# Altium PCB MAX5719 Breakout.PcbDoc
Units mm, origin at the board's own origin, x right, y up, seen from the top; angles counter-clockwise.
Board outline 55 x 55 mm, 4 copper layers (Top Layer, 2 GND, 3 GND, Bottom Layer), stack 1.592 mm thick; 49 components, 28 nets, 143 pads, 471 vias.
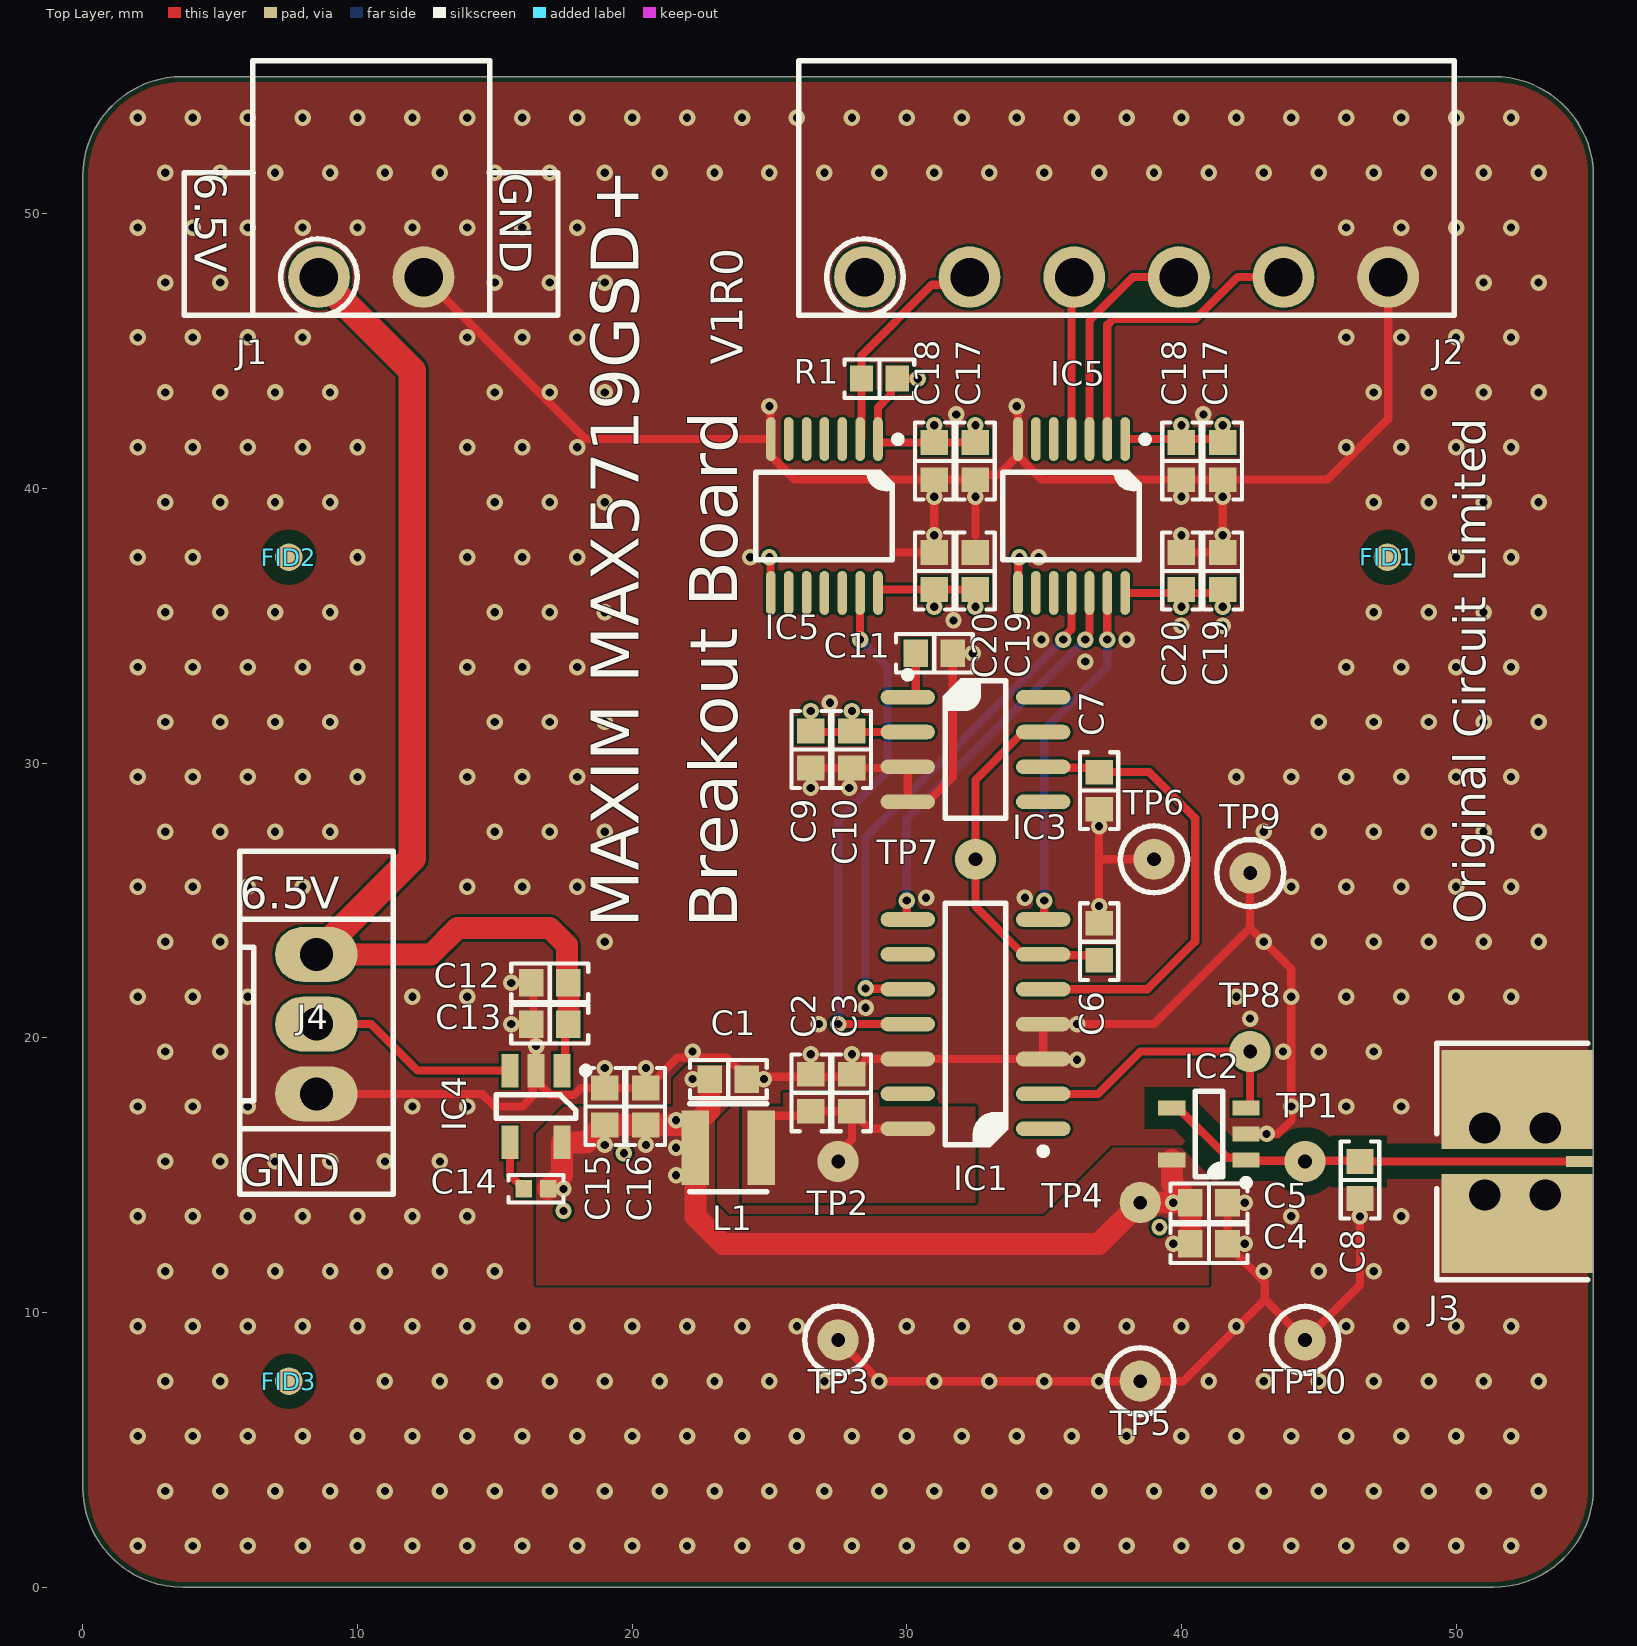
[diagram p0: Top Layer view]
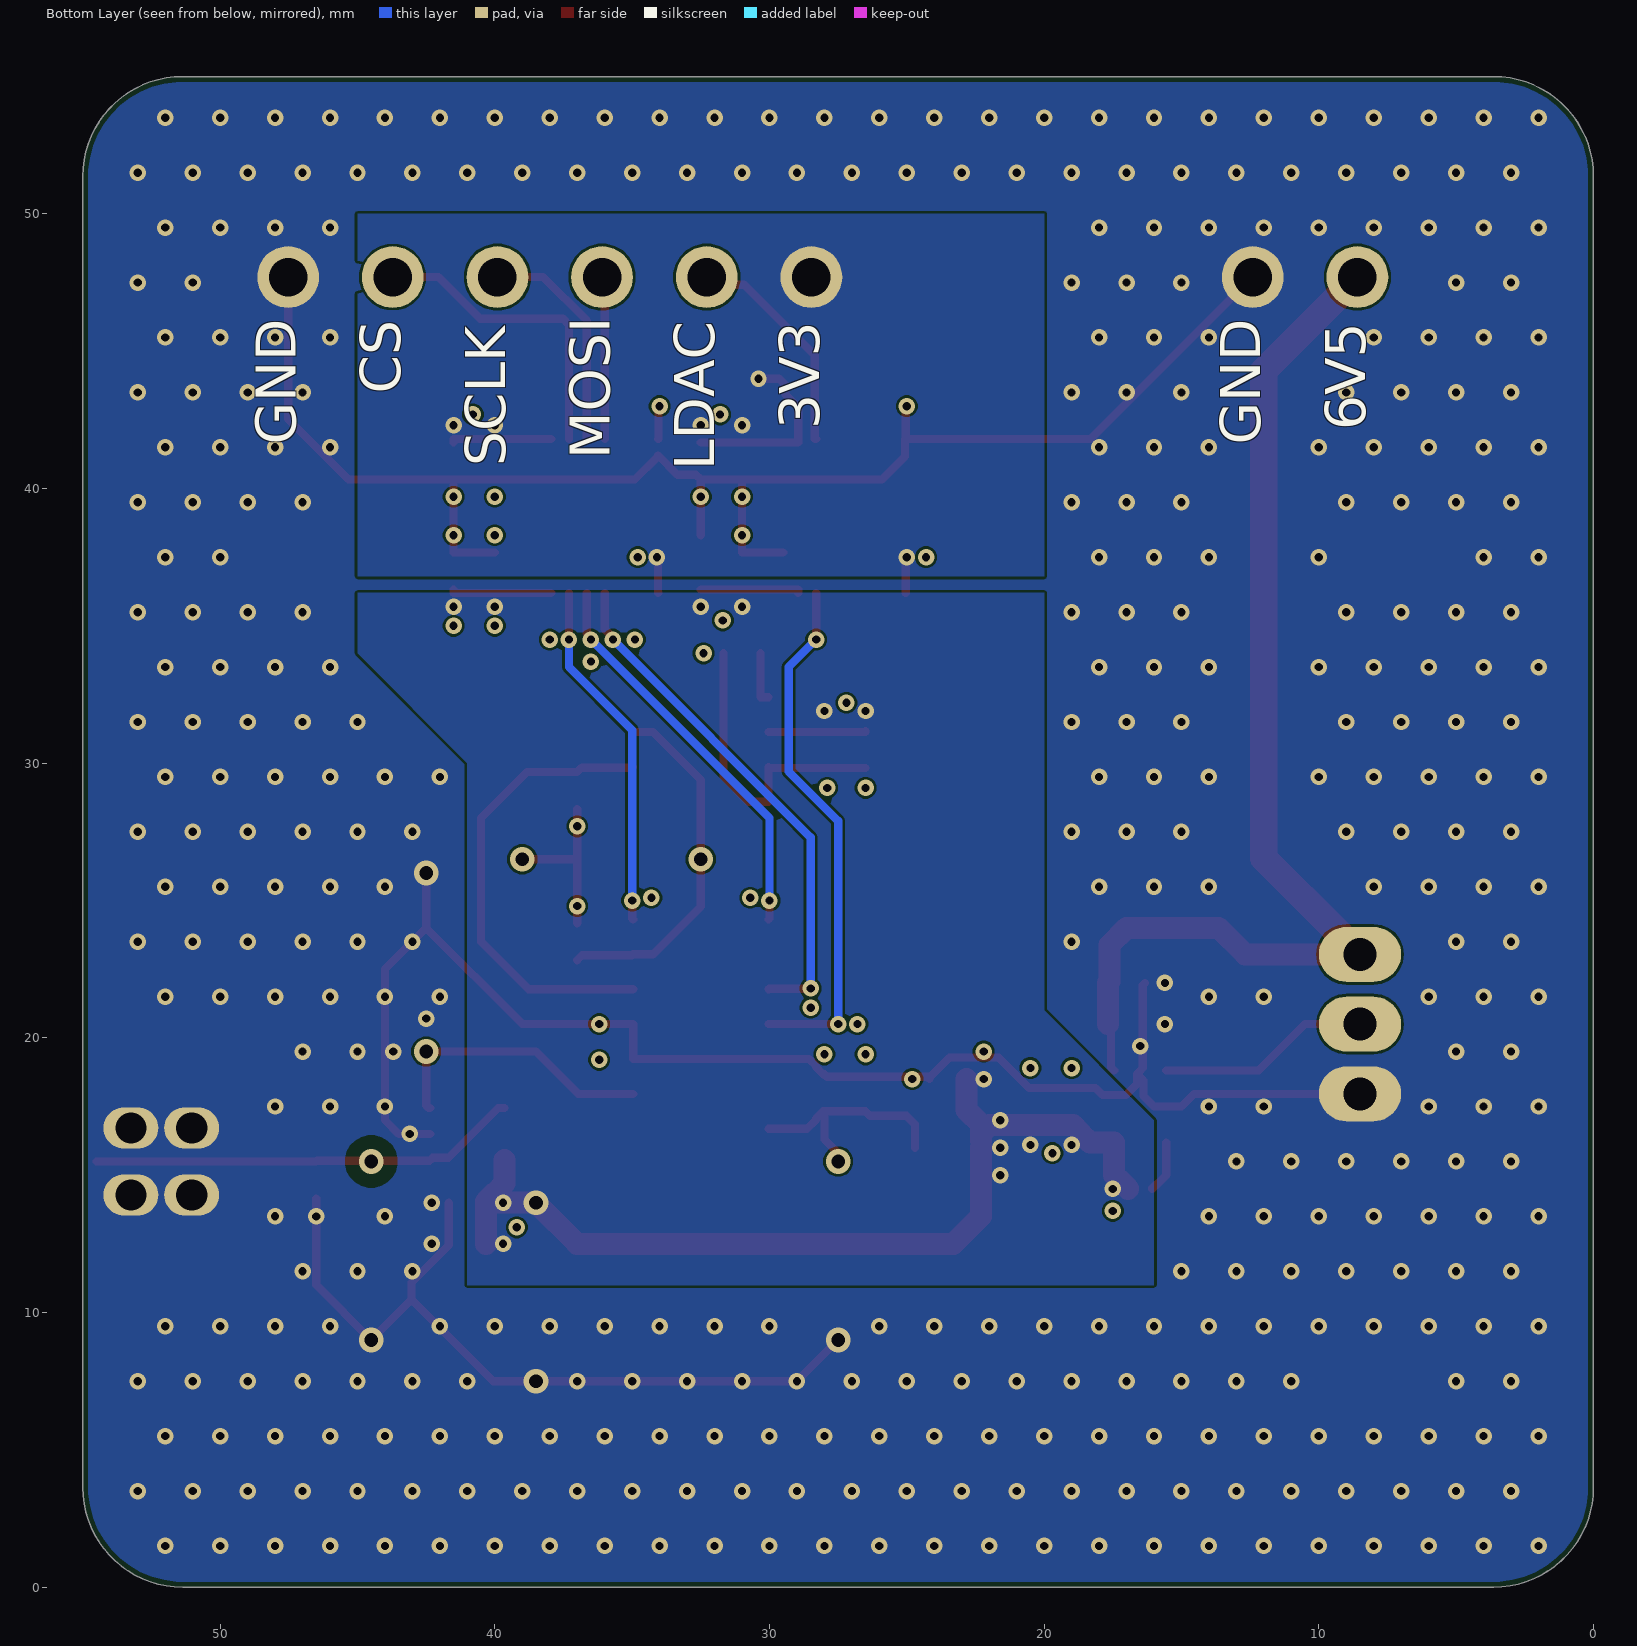
[diagram p1: Bottom Layer view, seen from below]
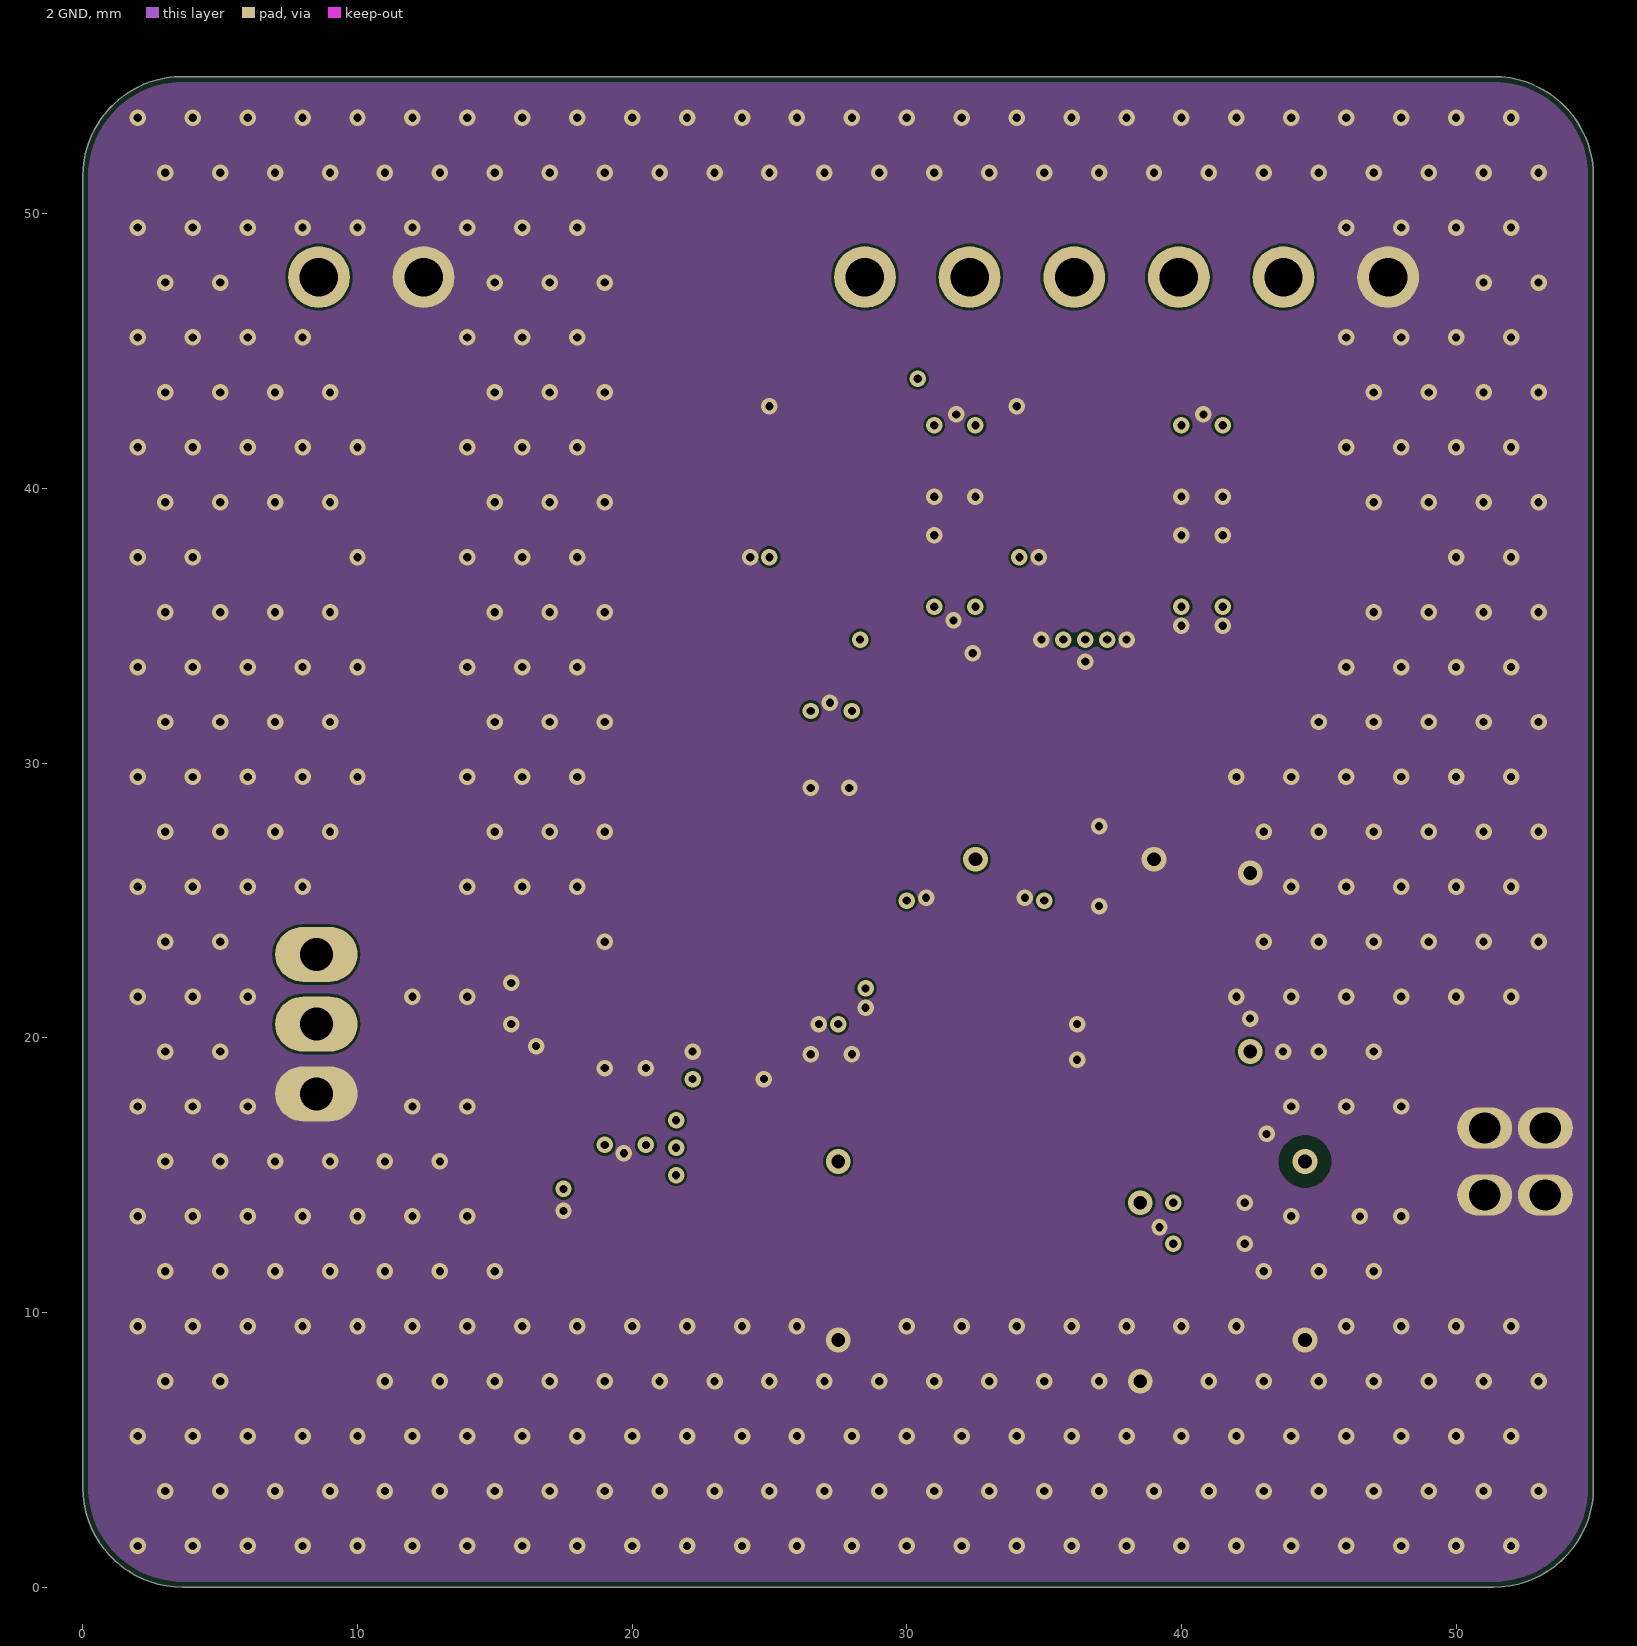
[diagram p2: 2 GND]
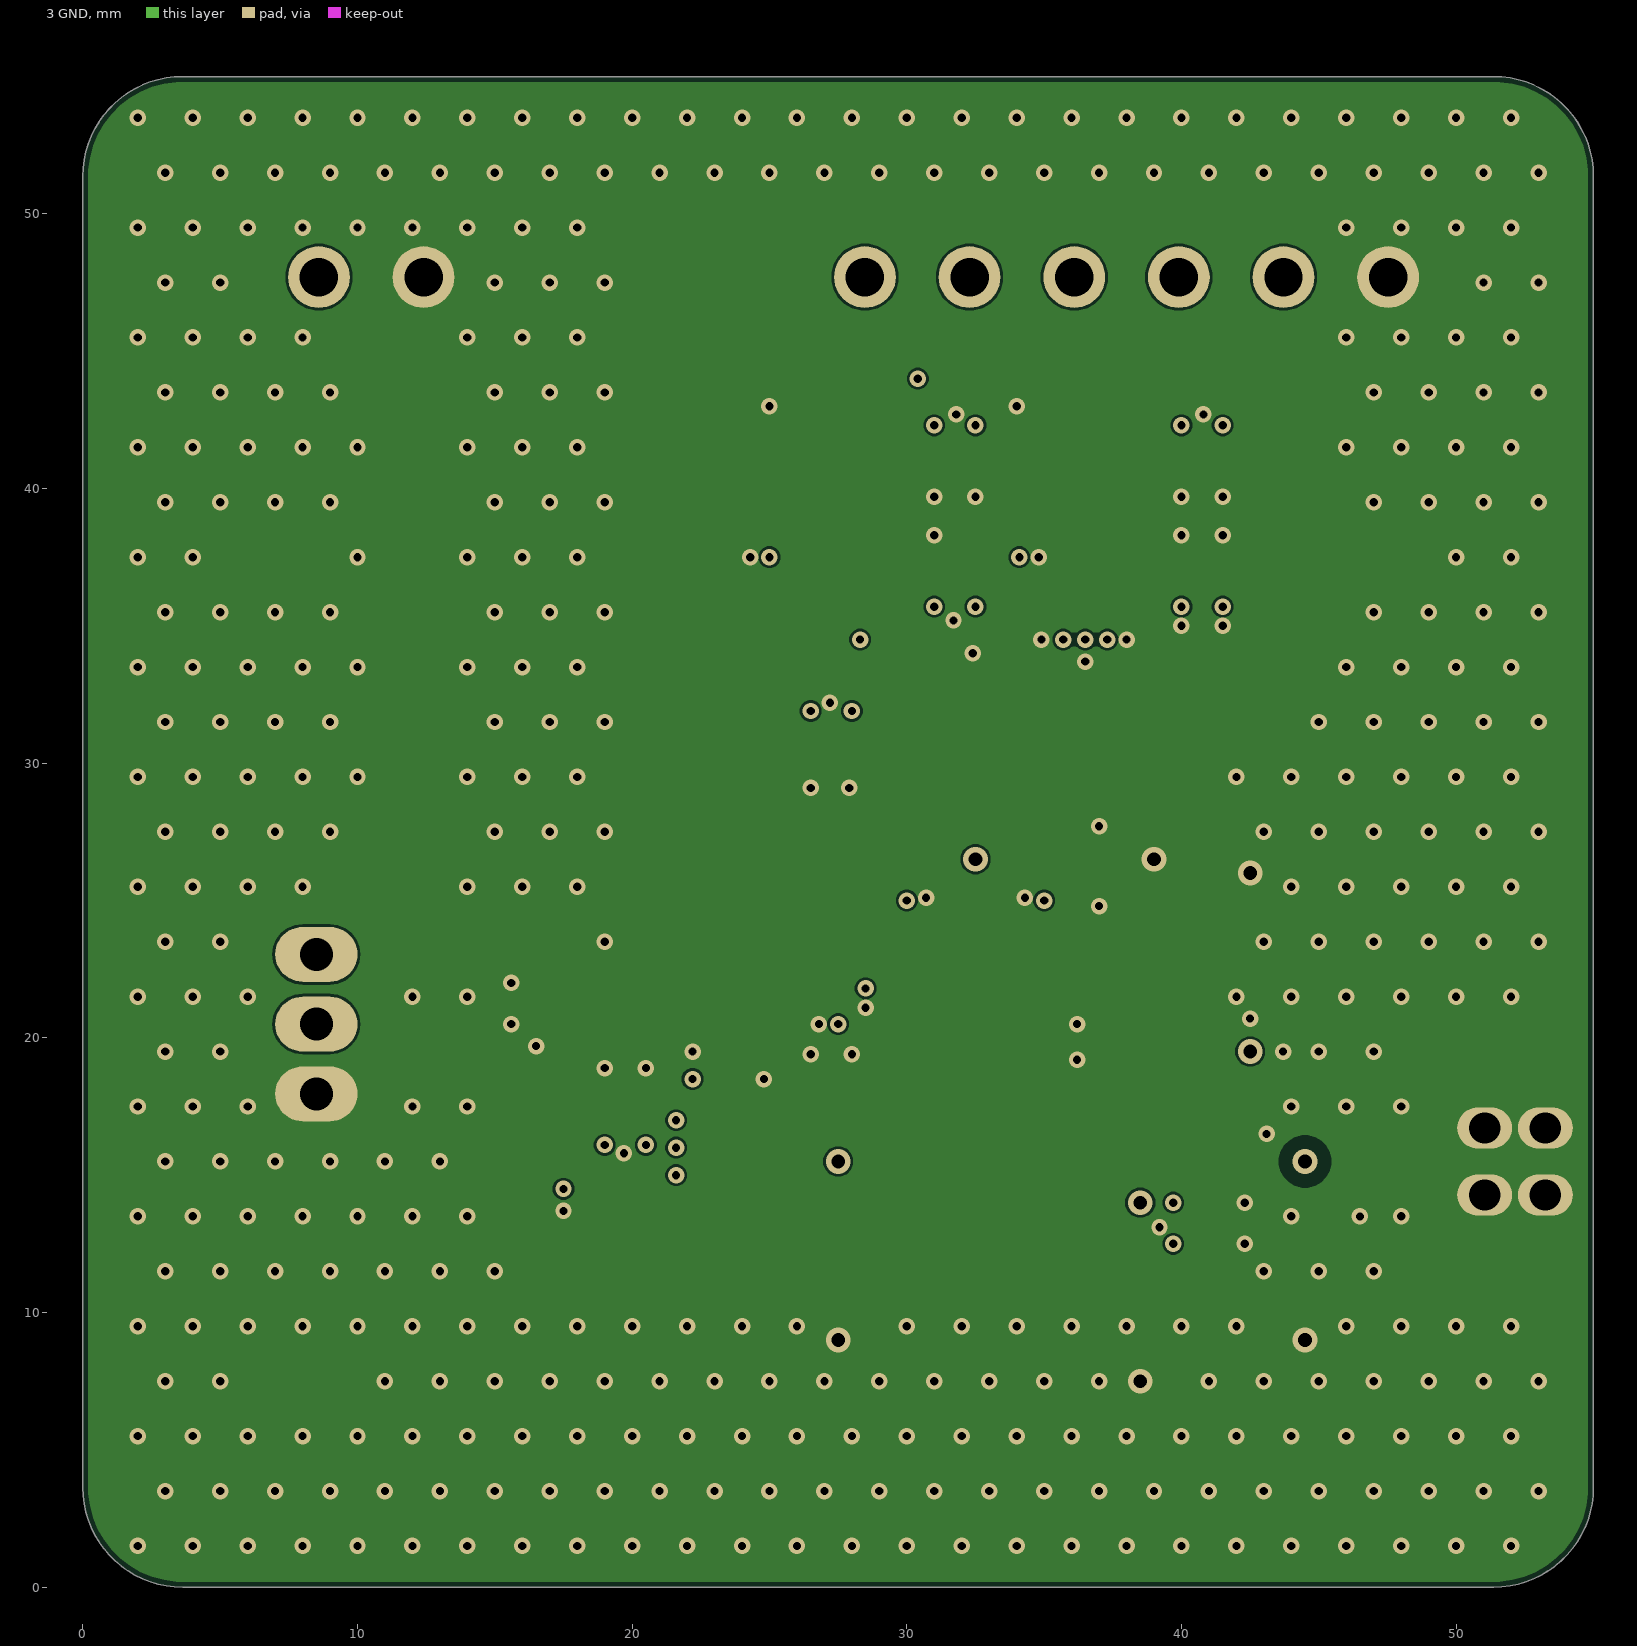
[diagram p3: 3 GND]
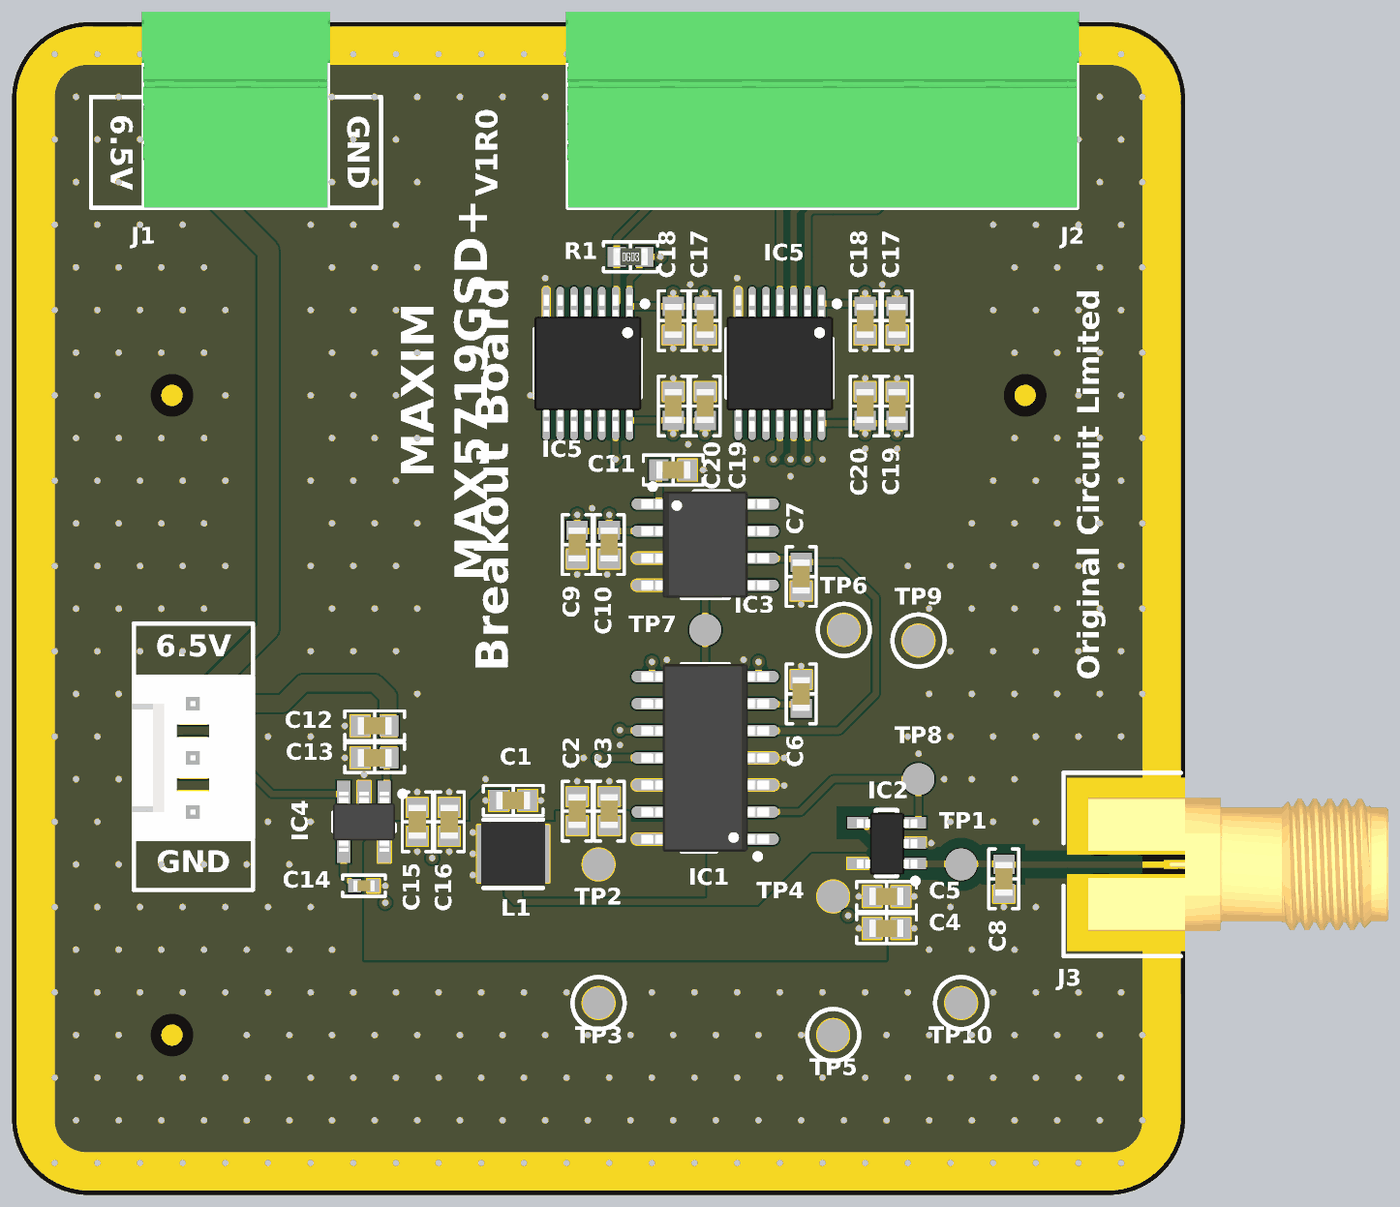
[diagram p4: 3D render of the assembled board from above, using the file's embedded part models]

## Layer stack, top to bottom
Top Solder: solder mask 0.0102, Solder Resist, Dk 3.8
Top Layer: signal copper 0.0356
Dielectric 2: prepreg 0.2104, PP-006, Dk 4.4
2 GND: signal copper 0.0175
Dielectric 1: dielectric 1.065, FR-4, Dk 4.6
3 GND: signal copper 0.0175
Dielectric 3: prepreg 0.2104, PP-006, Dk 4.4
Bottom Layer: signal copper 0.0356
Bottom Solder: solder mask 0.0102, Solder Resist, Dk 3.8

## Board outline
0,3.632 0,51.368 cw(c3.632,51.368) 3.632,55 51.368,55 cw(c51.368,51.368) 55,51.368 55,3.632 cw(c51.368,3.632) 51.368,0 3.632,0 cw(c3.632,3.632)

## Design rules (kind name [scope] priority, off if disabled: settings)
BoardOutlineClearance [IsPoly] p1: gap=0.2 ignorepadtopadclearanceinfootprint=FALSE
Clearance Clearance_BUFFOUT [InNet('BUFF_OUT') vs InPoly] p1: gap=0.5 ignorepadtopadclearanceinfootprint=FALSE
Clearance [All] p2: gap=0.09 ignorepadtopadclearanceinfootprint=FALSE except(0.2: Arc-THPad Track-THPad SMDPad-THPad; 0.5: THPad-THPad)
ComponentClearance [All] p1: gap=0.254 collisioncheckmode=3 verticalgap=0.254 showdistances=TRUE
MinimumSolderMaskSliver [All] p1: minsoldermaskwidth=0.1
PlaneClearance [All] p1: clearance=0.2
PolygonConnect [All] p1: connectstyle=Direct reliefconductorwidth=0.254 reliefentries=4 polygonreliefangle="90 Angle" airgapwidth=0.254
RoutingVias [All] p1: holewidth=0.3 width=0.6 viastyle="Through Hole" minholewidth=0.15 minwidth=0.45 maxholewidth=6.3 maxwidth=6.6
SilkToSilkClearance [All] p1: silktosilkclearance=-3
SilkToSolderMaskClearance [IsPad] p1: minsilkscreentomaskgap=-3 clearancetoexposedcopper=TRUE
SolderMaskExpansion SolderMaskExpansion_Via [IsVia] p1: expansion=0.102 istentingtop=TRUE
SolderMaskExpansion [All] p2: expansion=0.05 istentingtop=FALSE
Width [All] p1: maxlimit=3 minlimit=0.09 preferedwidth=0.2
25 further rules are at their usual default settings.

## Classes and differential pairs
channel class "Level Shifter": LDAC_SHIFT SPI_SHIFT
component class SPI_SHIFT: C17 C18 C19 C20 IC5
component class PSU: C12 C13 C14 C15 C16 IC4 J4
component class Overview: FID1 FID2 FID3 J1 J2 J3 R1 TP1 TP10
component class LDAC_SHIFT: C17 C18 C19 C20 IC5
component class DAC: C1 C2 C3 C4 C5 C6 C7 C8 C9 C10 C11 IC1 IC2 IC3 L1 TP2 TP3 TP4 TP5 TP6 TP7 TP8 TP9

## Components (designator, comment, footprint, x,y, rotation, side; value= is the part's Value field where it differs from the comment)
C1 "22 µF" "CAP 0603_1608" 23.5,18.5 r180 top
C2 "1 µF" "CAP 0603_1608" 26.5,18 r270 top
C3 "0.1 µF" "CAP 0603_1608" 28,18 r90 top
C4 "1 µF" "CAP 0603_1608" 41,12.5 r180 top
C5 "0.1 µF" "CAP 0603_1608" 41,14 r0 top
C6 "1 µF" "CAP 0603_1608" 37,23.5 r270 top
C7 "0.1 µF" "CAP 0603_1608" 37,29 r270 top
C8 "0.1 µF" "CAP 0603_1608" 46.5,14.825 r270 top
C9 "22 µF" "CAP 0603_1608" 26.5,30.5 r90 top
C10 "1 µF" "CAP 0603_1608" 28,30.5 r90 top
C11 "0.1 µF" "CAP 0603_1608" 31,34 r0 top
C12 "22 µF" "CAP 0603_1608" 17,22 r0 top
C13 "1 µF" "CAP 0603_1608" 17,20.5 r0 top
C14 "10000 pF" "CAP 0402_1005" 16.5,14.5 r180 top
C15 "1 µF" "CAP 0603_1608" 19,17.5 r270 top
C16 "22 µF" "CAP 0603_1608" 20.5,17.5 r270 top
C17 "1 µF" "CAP 0603_1608" 41.5,41 r90 top
C17 "1 µF" "CAP 0603_1608" 32.5,41 r90 top
C18 "0.1 µF" "CAP 0603_1608" 40,41 r270 top
C18 "0.1 µF" "CAP 0603_1608" 31,41 r270 top
C19 "1 µF" "CAP 0603_1608" 41.5,37 r270 top
C19 "1 µF" "CAP 0603_1608" 32.5,37 r270 top
C20 "0.1 µF" "CAP 0603_1608" 40,37 r90 top
C20 "0.1 µF" "CAP 0603_1608" 31,37 r90 top
FID1 "Fiducial" Fiducial-1mm 47.5,37.5 r90 top
FID2 "Fiducial" Fiducial-1mm 7.5,37.5 r90 top
FID3 "Fiducial" Fiducial-1mm 7.5,7.5 r90 top
IC1 "MAX5719GSD+" "AD SOIC-14 S14+4" 32.5,20.5 r180 top
IC2 "LMP2011MFX/NOPB" "TI SOT-23-5 DBV" 41,16.5 r180 top
IC3 "MAX6126AASA30+" "AD SOIC-8 S8+4" 32.5,30.5 r0 top
IC4 "LT1761IS5-5#TRMPBF" "AD SOT-23-5 S5  05-08-1635" 16.5,17.5 r270 top
IC5 "TXU0304PWR" "TI TSSOP-14 PW" 36,39 r270 top
IC5 "TXU0304PWR" "TI TSSOP-14 PW" 27,39 r270 top
J1 "OQ0232510000G" "FCI 06-381-2PIN" 10.5,51 r0 top
J2 "OQ0632510000G" "FCI 06-381-6PIN" 38,51 r0 top
J3 "901-10510-2" "AMPHENOL 901-10510-2" 55,15.5 r0 top
J4 "0022272031" "MOLEX KK 0022272031" 8.5,20.5 r270 top
L1 "4.7 µH" "WURTH WE-LQS 3015" 23.5,16 r0 top
R1 "10 kOhms" "RES 0603_1608" 29,44 r0 top
TP1 "Test Point" TestPoint-1.5mm#1 44.5,15.5 r0 top
TP2 "Test Point" TestPoint-1.5mm#1 27.5,15.5 r90 top
TP3 "Test Point" TestPoint-1.5mm#1 27.5,9 r90 top
TP4 "Test Point" TestPoint-1.5mm#1 38.5,14 r90 top
TP5 "Test Point" TestPoint-1.5mm#2 38.5,11.5 r90 top
TP6 "Test Point" TestPoint-1.5mm#1 39,26.5 r90 top
TP7 "Test Point" TestPoint-1.5mm#1 32.5,26.5 r90 top
TP8 "Test Point" TestPoint-1.5mm#1 42.5,19.5 r90 top
TP9 "Test Point" TestPoint-1.5mm#1 42.5,26 r90 top
TP10 "Test Point" TestPoint-1.5mm#1 44.5,9 r90 top

## Footprints (in the part's own frame and the unit in brackets; to place one, negate y for a bottom-side part, rotate by r counter-clockwise, add the part's x,y. Pads: shape width x height; smd on the part's side, far side on the other; paste and mask are expansions set on the pad)
"AD SOIC-8 S8+4" [mm] "SOIC, 8-Leads, Body 4.90x3.90mm, Pitch 1.27mm, IPC Medium Density"
  oval 1.98x0.53 smd: 1(-2.465,1.905) 2(-2.465,0.635) 3(-2.465,-0.635) 4(-2.465,-1.905) 5(2.465,-1.905) 6(2.465,-0.635) 7(2.465,0.635) 8(2.465,1.905)
  silkscreen extent -2.59,-2.5 1.1,2.84, body extent -3,-2.5 3,2.5, height 1.75
"AD SOIC-14 S14+4" [mm] "SOIC, 14-Leads, Body 8.65x3.90mm, Pitch 1.27mm, IPC Medium Density"
  oval 1.981x0.533 smd: 1(-2.464,3.81) 2(-2.464,2.54) 3(-2.464,1.27) 4(-2.464,0) 5(-2.464,-1.27) 6(-2.464,-2.54) 7(-2.464,-3.81) 8(2.464,-3.81) 9(2.464,-2.54) 10(2.464,-1.27) 11(2.464,0) 12(2.464,1.27) 13(2.464,2.54) 14(2.464,3.81)
  silkscreen extent -2.59,-4.4 1.1,4.75, body extent -3,-4.4 3,4.4, height 1.75
"AD SOT-23-5 S5  05-08-1635" [mm] "SOT23, 5-Leads, Body 2.90x2.80mm, Pitch 0.95mm, IPC Medium Density"
  rect 1.22x0.62 smd: 1(-1.31,0.95) 2(-1.31,0) 3(-1.31,-0.95) 4(1.31,-0.95) 5(1.31,0.95)
  silkscreen extent -1.43,-1.45 0.43,1.94, body extent -1.4,-1.45 1.4,1.45, height 1
"AMPHENOL 901-10510-2" [mm] "High Freq End Launch SMA Jack PC Mount"
  oval 2x1.5 hole 1.14: G(-3.96,-1.22) G(-3.96,1.22) G(-1.75,-1.22) G(-1.75,1.22)
  rect 5.54x3.61 smd paste-2539.97 mask+0: G(-2.77,-2.26) G(-2.77,2.26)
  rect 1x0.41 smd paste-2539.97 mask+0: S(-0.5,0)
  silkscreen extent -5.7,-4.3 -0.2,4.3, body extent -4.55,-3.14 9.53,3.14, height 3.22
"CAP 0402_1005" [mm] "Chip Capacitor, 2-Leads, Body 1.02x0.51mm, IPC Medium Density"
  rect 0.6x0.64 smd: 1(-0.44,0) 2(0.44,0)
  silkscreen extent -1,-0.5 1,0.5, body extent -0.5,-0.26 0.5,0.26, height 0.52
"CAP 0603_1608" [mm] "Chip Capacitor, 2-Leads, Body 1.60x0.80mm, IPC Medium Density"
  rect 0.9x1 smd: 1(-0.675,0) 2(0.675,0)
  silkscreen extent -1.4,-0.7 1.4,0.7, body extent -0.8,-0.41 0.8,0.41, height 0.82
"FCI 06-381-2PIN" [mm] "FCI Pluggable Terminal Block"
  round 2.25 hole 1.4: 1(-1.905,-3.302) 2(1.905,-3.302)
  silkscreen extent -4.32,-4.7 4.32,4.57, body extent -4.4,-4.7 4.4,4.5, height 7.6
"FCI 06-381-6PIN" [mm] "FCI Pluggable Terminal Block"
  round 2.25 hole 1.4: 1(-9.525,-3.302) 2(-5.715,-3.302) 3(-1.905,-3.302) 4(1.905,-3.302) 5(5.715,-3.302) 6(9.525,-3.302)
  silkscreen extent -11.94,-4.7 11.94,4.57, body extent -12.02,-4.7 12.02,4.5, height 7.6
Fiducial-1mm [mm]
  round 1 smd paste-1 mask+0.5: F(0,0)
  Top Layer pour cut-out: -1,0 -0.924,0.383 -0.707,0.707 -0.383,0.924 0,1 0,1 0.383,0.924 0.707,0.707 0.924,0.383 1,0 1,0 0.924,-0.383 0.707,-0.707 0.383,-0.924 0,-1 0,-1 -0.383,-0.924 -0.707,-0.707 -0.924,-0.383 -1,0
"MOLEX KK 0022272031" [mm]
  oval 2x3 hole 1.2: 1(-2.54,0) 2(0,0) 3(2.54,0)
  silkscreen extent -3.81,-2.79 3.81,2.79, body extent -3.81,-2.9 3.81,2.9, height 11.7
"RES 0603_1608" [mm] "Chip Resistor, 2-Leads, Body 1.60x0.80mm, IPC Medium Density"
  rect 0.85x0.95 smd: 1(-0.65,0) 2(0.65,0)
  silkscreen extent -1.27,-0.7 1.27,0.7, body extent -0.8,-0.4 0.8,0.4, height 0.45
TestPoint-1.5mm#1 [mm]
  round 1.5 smd: 1(0,0)
TestPoint-1.5mm#2 [mm]
  round 1.5 smd: 1(-4,0)
"TI SOT-23-5 DBV" [mm] "SOT23, 5-Leads, Body 2.90x2.80mm, Pitch 0.95mm, IPC Medium Density"
  rect 1x0.55 smd: 1(-1.35,0.95) 2(-1.35,0) 3(-1.35,-0.95) 4(1.35,-0.95) 5(1.35,0.95)
  silkscreen extent -1.48,-1.55 0.5,1.9, body extent -1.44,-1.43 1.39,1.48, height 1.5
"TI TSSOP-14 PW" [mm] "TSSOP, 14-Leads, Body 5.00x4.40mm, Pitch 0.65mm, IPC Medium Density"
  oval 1.6x0.35 smd: 1(-2.8,1.95) 2(-2.8,1.3) 3(-2.8,0.65) 4(-2.8,0) 5(-2.8,-0.65) 6(-2.8,-1.3) 7(-2.8,-1.95) 8(2.8,-1.95) 9(2.8,-1.3) 10(2.8,-0.65) 11(2.8,0) 12(2.8,0.65) 13(2.8,1.3) 14(2.8,1.95)
  silkscreen extent -2.92,-2.5 1.6,2.8, body extent -3.21,-2.5 3.21,2.5, height 1.2
"WURTH WE-LQS 3015" [mm] "SMD Power Inductor, 2-Leads, body 3x3mm"
  rect 1x2.7 smd: 1(-1.2,0) 2(1.2,0)
  silkscreen extent -1.4,-1.6 1.4,1.6, body extent -1.5,-1.5 1.5,1.5, height 1.5

## Part data
C1 C9 C12 C16: library part CL10A226MP8NUNE, "CAP CER 22UF 10V X5R 0603", Device Package="0603 (1608 Metric)", Manufacturer="Samsung Electro-Mechanics", Operating Temperature="-55°C ~ 85°C", Supplier Part Number 1=1276-1274-1-ND, Temperature Coefficient=X5R, Tolerance=±20%, Voltage - Rated=10V, Applications="General Purpose", Capacitance="22 µF", ComponentLink1Description=Datasheet, ComponentLink1URL=http://www.samsungsem.com/kr/support/product-search/mlcc/CL10A226MP8NUNE.jsp, ComponentLink2Description="DigiKey Link", ComponentLink2URL=https://www.digikey.com/en/products/detail/samsung-electro-mechanics/CL10A226MP8NUNE/3886932, LastUpdated="02/11/2023 19:13:02", Lifecycle Status=Active, Minimum Order=1, Mounting Type="Surface Mount, MLCC", Package / Case="0603 (1608 Metric)", Packaging=TapeAndReel, Part Number=CL10A226MP8NUNE, Part Status=Active, partid=11458, Price=0.02, Series=CL, Size / Dimension="0.063\" L x 0.031\" W (1.60mm x 0.80mm)", Supplier 1=DigiKey, Thickness (Max)="0.035\" (0.90mm)"
C2 C4 C6 C10 C13 C15 C17 C17 C19 C19: library part GCM188R71E105KA64D, "CAP CER 1UF 25V X7R 0603", Device Package="0603 (1608 Metric)", Manufacturer="Murata Electronics", Operating Temperature="-55°C ~ 125°C", Ratings=AEC-Q200, Supplier Part Number 1=490-10673-1-ND, Temperature Coefficient=X7R, Tolerance=±10%, Voltage - Rated=25V, Applications=Automotive, Capacitance="1 µF", ComponentLink1Description=Datasheet, ComponentLink1URL=https://www.murata.com/~/media/webrenewal/support/library/catalog/products/capacitor/mlcc/c03e.ashx?la=en-us, ComponentLink2Description="DigiKey Link", ComponentLink2URL=https://www.digikey.com/en/products/detail/murata-electronics/GCM188R71E105KA64D/4903956, LastUpdated="20/08/2023 19:09:04", Lifecycle Status=Active, Minimum Order=1, Mounting Type="Surface Mount, MLCC", Package / Case="0603 (1608 Metric)", Packaging=TapeAndReel, Part Number=GCM188R71E105KA64D, Part Status=Active, partid=6762, Price=0.03, Series=GCM, Size / Dimension="0.063\" L x 0.031\" W (1.60mm x 0.80mm)", Supplier 1=DigiKey, Thickness (Max)="0.035\" (0.90mm)"
C3 C5 C7 C8 C11 C18 C18 C20 C20: library part CL10B104KB8NNNC, "CAP CER 0.1UF 50V X7R 0603", Device Package="0603 (1608 Metric)", Manufacturer="Samsung Electro-Mechanics", Operating Temperature="-55°C ~ 125°C", Supplier Part Number 1=1276-1000-1-ND, Temperature Coefficient=X7R, Tolerance=±10%, Voltage - Rated=50V, Applications="General Purpose", Capacitance="0.1 µF", ComponentLink1Description=Datasheet, ComponentLink1URL=http://www.samsungsem.com/kr/support/product-search/mlcc/CL10B104KB8NNNC.jsp, ComponentLink2Description="DigiKey Link", ComponentLink2URL=https://www.digikey.com/en/products/detail/samsung-electro-mechanics/CL10B104KB8NNNC/3886658, LastUpdated="02/11/2023 19:13:06", Lifecycle Status=Active, Minimum Order=1, Mounting Type="Surface Mount, MLCC", Package / Case="0603 (1608 Metric)", Packaging=TapeAndReel, Part Number=CL10B104KB8NNNC, Part Status=Active, partid=9788, Price=0.01, Series=CL, Size / Dimension="0.063\" L x 0.031\" W (1.60mm x 0.80mm)", Supplier 1=DigiKey, Thickness (Max)="0.035\" (0.90mm)"
C14: library part GCM155R71H103KA55D, "CAP CER 10000PF 50V X7R 0402", Device Package="0402 (1005 Metric)", Manufacturer="Murata Electronics", Operating Temperature="-55°C ~ 125°C", Ratings=AEC-Q200, Supplier Part Number 1=490-4762-1-ND, Temperature Coefficient=X7R, Tolerance=±10%, Voltage - Rated=50V, Applications=Automotive, Capacitance="10000 pF", ComponentLink1Description=Datasheet, ComponentLink1URL=https://psearch.en.murata.com/capacitor/product/GCM155R71H103KA55%23.pdf, ComponentLink2Description="DigiKey Link", ComponentLink2URL=https://www.digikey.com/en/products/detail/murata-electronics/GCM155R71H103KA55D/1641636, LastUpdated="20/01/2024 20:04:13", Lifecycle Status=Active, Minimum Order=1, Mounting Type="Surface Mount, MLCC", Package / Case="0402 (1005 Metric)", Packaging=CutTape, Part Number=GCM155R71H103KA55D, Part Status=Active, partid=12687, Price=0.01, Series=GCM, Size / Dimension="0.039\" L x 0.020\" W (1.00mm x 0.50mm)", Supplier 1=DigiKey, Thickness (Max)="0.022\" (0.55mm)"
FID1 FID2 FID3: library part CMP-002-000000-1, Component Type=Standard, Design Item ID=Fiducial, Pin Count=0, Source=Fiducial.SchLib
IC1: "IC DAC 20BIT V-OUT 14SOIC", Manufacturer="Analog Devices Inc./Maxim Integrated", Operating Temperature="-40°C ~ 105°C", Supplier Device Package=14-SOIC, Supplier Part Number 1=MAX5719GSD+-ND, Voltage - Supply, Analog=5V, Architecture=R-2R, ComponentLink1Description=Datasheet, ComponentLink1URL=https://datasheets.maximintegrated.com/en/ds/MAX5717-MAX5719.pdf, ComponentLink2Description="DigiKey Link", ComponentLink2URL=https://www.digikey.com/en/products/detail/analog-devices-inc-maxim-integrated/MAX5719GSD/6166219, Data Interface="SPI, DSP", Differential Output=No, INL/DNL (LSB)="±1, ±1", LastUpdated="16/03/2024 19:39:58", Lifecycle Status=Active, Minimum Order=1, Mounting Type="Surface Mount", Number of Bits=20, Number of D/A Converters=1, Output Type="Voltage - Unbuffered", Packaging=Tube, Part Number=MAX5719GSD+, Part Status=Active, partid=4, Price=24.08, Reference Type=External, Series=-, Settling Time="1.5µs (Typ)", Supplier 1=DigiKey, Voltage - Supply, Digital=5V
IC2: "IC OPAMP GP 1 CIRCUIT SOT23-5", Current - Input Bias="3 pA", Current - Output / Channel="17 mA", Current - Supply=930µA, Manufacturer="Texas Instruments", Operating Temperature="-40°C ~ 125°C", Package / Case="SC-74A, SOT-753", Supplier Device Package=SOT-23-5, Supplier Part Number 1=LMP2011MFX/NOPBCT-ND, Voltage - Input Offset="0.12 µV", Voltage - Supply, Single/Dual (±)="2.7V ~ 5.25V", Amplifier Type="General Purpose", ComponentLink1Description=Datasheet, ComponentLink1URL=http://www.ti.com/general/docs/suppproductinfo.tsp?distId=10&gotoUrl=http%3A%2F%2Fwww.ti.com%2Flit%2Fgpn%2Flmp2011, ComponentLink2Description="DigiKey Link", ComponentLink2URL=https://www.digikey.com/en/products/detail/texas-instruments/LMP2011MFX-NOPB/1872224, Gain Bandwidth Product="3 MHz", LastUpdated="22/03/2024 21:05:57", Lifecycle Status=Active, Minimum Order=1, Mounting Type="Surface Mount", Number of Circuits=1, Output Type=Rail-to-Rail, Packaging=TapeAndReel, Part Number=LMP2011MFX/NOPB, Part Status=Active, partid=61, Price=1.14, Series=LMP®, Slew Rate=4V/µs, Supplier 1=DigiKey
IC3: "IC VREF SERIES 0.02% 8SOIC", Current - Output=10mA, Current - Supply=725µA, Manufacturer="Maxim Integrated", Operating Temperature="-40°C ~ 125°C (TA)", Package / Case="8-SOIC (0.154\", 3.90mm Width)", Supplier Device Package=8-SOIC, Supplier Part Number 1=MAX6126AASA30+-ND, Temperature Coefficient=5ppm/°C, Tolerance=±0.02%, Voltage - Input="3.2V ~ 12.6V", Voltage - Output (Min/Fixed)=3V, ComponentLink1Description=Datasheet, ComponentLink1URL=https://datasheets.maximintegrated.com/en/ds/MAX6126.pdf, ComponentLink2Description="DigiKey Link", ComponentLink2URL=http://digikey.com/product-detail/en/maxim-integrated/MAX6126AASA30/MAX6126AASA30-ND/1867184, LastUpdated="16/03/2024 19:47:53", Lifecycle Status=Active, Minimum Order=1, Mounting Type="Surface Mount", Noise - 0.1Hz to 10Hz=1.75µVp-p, Output Type=Fixed, Packaging=Tube, Part Number=MAX6126AASA30+, Part Status=Active, Price=7.82, Reference Type=Series, Series=-, Supplier 1=DigiKey
IC4: "IC REG LINEAR 5V 100MA TSOT23-5", Current - Output=100mA, Manufacturer="Analog Devices Inc.", Operating Temperature="-40°C ~ 125°C", Supplier Device Package=TSOT-23-5, Supplier Part Number 1=505-LT1761IS5-5#TRMPBFCT-ND, Voltage - Input (Max)=20V, Voltage - Output (Min/Fixed)=5V, Voltage Dropout (Max)="0.45V @ 100mA", ComponentLink1Description=Datasheet, ComponentLink1URL=https://www.analog.com/media/en/technical-documentation/data-sheets/1761sff.pdf, ComponentLink2Description="DigiKey Link", ComponentLink2URL=https://www.digikey.com/en/products/detail/analog-devices-inc/LT1761IS5-5-TRMPBF/2107694, Control Features=Enable, LastUpdated="16/03/2024 20:02:34", Lifecycle Status=Active, Minimum Order=1, Mounting Type="Surface Mount", Number of Regulators=1, Output Configuration=Positive, Output Type=Fixed, Packaging=TapeAndReel, Part Number=LT1761IS5-5#TRMPBF, Part Status=Active, Price=1.91, Protection Features="Over Current, Over Temperature, Reverse Polarity", PSRR="65dB (120Hz)", Series=-, Supplier 1=DigiKey
IC5 IC5: "IC TRANSLATOR UNIDIR 14TSSOP", Manufacturer="Texas Instruments", Operating Temperature="-40°C ~ 125°C (TA)", Supplier Device Package=14-TSSOP, Supplier Part Number 1=296-TXU0304PWRCT-ND, Voltage - VCCA="1.08 V ~ 5.5 V", Channel Type=Unidirectional, Channels per Circuit=4, ComponentLink1Description=Datasheet, ComponentLink1URL=https://www.ti.com/general/docs/suppproductinfo.tsp?distId=10&gotoUrl=http%3A%2F%2Fwww.ti.com%2Flit%2Fgpn%2Ftxu0304, ComponentLink2Description="DigiKey Link", ComponentLink2URL=https://www.digikey.com/en/products/detail/texas-instruments/TXU0304PWR/14641423, Data Rate=200Mbps, LastUpdated="16/03/2024 20:45:15", Lifecycle Status=Active, Minimum Order=1, Mounting Type="Surface Mount", Number of Circuits=1, Output Type=Tri-State, Packaging=TapeAndReel, Part Number=TXU0304PWR, Part Status=Active, Price=0.32, Series=-, Supplier 1=DigiKey, Translator Type="Voltage Level", Voltage - VCCB="1.08 V ~ 5.5 V"
J1: "TERM BLOCK HDR 2POS 90DEG 3.81MM", Color=Green, Current - UL=10A, Manufacturer="Amphenol Anytek", Operating Temperature="-40°C ~ 115°C", Supplier Part Number 1=609-3819-ND, Voltage - UL=300V, ComponentLink1Description=Datasheet, ComponentLink1URL=http://portal.fciconnect.com/Comergent//fci/drawing/oqxx32x100j0g.pdf, ComponentLink2Description="DigiKey Link", ComponentLink2URL=//digikey.com/product-detail/en/amphenol-anytek/OQ0232510000G/609-3819-ND/2261255, Contact Mating Finish=Tin, Header Orientation="90°, Right Angle", LastUpdated="16/12/2019 19:14:30", Lifecycle Status=0, Minimum Order=1, Mounting Type="Through Hole", Number of Levels=1, Number of Positions=2, Packaging=Bulk, Part Number=OQ0232510000G, Part Status=Active, Pitch="0.150\" (3.81mm)", Positions Per Level=2, Price=0.49, Series=06-381, Supplier 1=DigiKey, Termination Style=Solder, Type="Header, Male Pins, Shrouded (4 Side)"
J2: "TERM BLOCK HDR 6POS 90DEG 3.81MM", Color=Green, Current - UL=10A, Manufacturer="Amphenol Anytek", Operating Temperature="-40°C ~ 115°C", Supplier Part Number 1=609-3823-ND, Voltage - UL=300V, ComponentLink1Description=Datasheet, ComponentLink1URL=http://portal.fciconnect.com/Comergent//fci/drawing/oqxx32x100j0g.pdf, ComponentLink2Description="DigiKey Link", ComponentLink2URL=//digikey.com/product-detail/en/amphenol-anytek/OQ0632510000G/609-3823-ND/2261282, Contact Mating Finish=Tin, Header Orientation="90°, Right Angle", LastUpdated="16/12/2019 19:16:11", Lifecycle Status=0, Minimum Order=1, Mounting Type="Through Hole", Number of Levels=1, Number of Positions=6, Packaging=Bulk, Part Number=OQ0632510000G, Part Status=Active, Pitch="0.150\" (3.81mm)", Positions Per Level=6, Price=0.80, Series=06-381, Supplier 1=DigiKey, Termination Style=Solder, Type="Header, Male Pins, Shrouded (4 Side)"
J3: "CONN SMA JACK R/A 50OHM EDGE MNT", Frequency - Max="26.5 GHz", Manufacturer="Amphenol RF", Supplier Part Number 1=ARF2496-ND, ComponentLink1Description=Datasheet, ComponentLink1URL=http://www.amphenolrf.com/index.php/downloads/dl/file/id/7684/product/0/sma_high_frequency_connectors.pdf, ComponentLink2Description="DigiKey Link", ComponentLink2URL=https://www.digikey.com/en/products/detail/amphenol-rf/901-10510-2/6051059, Connector Style=SMA, Connector Type="Jack, Female Socket", Contact Termination=Solder, Fastening Type=Threaded, Impedance=50Ohm, LastUpdated="29/03/2023 22:34:51", Lifecycle Status=Active, Minimum Order=1, Mounting Type="Board Edge, End Launch; Through Hole, Right Angle", Number of Ports=1, Packaging=Bulk, Part Number=901-10510-2, Part Status=Active, Price=7.52, Series=-, Shield Termination=Solder, Supplier 1=DigiKey
J4: "CONN HEADER VERT 3POS 2.54MM", Insulation Color=Natural, Manufacturer=Molex, Material Flammability Rating="UL94 V-0", Supplier Part Number 1=WM4112-ND, ComponentLink1Description=Datasheet, ComponentLink1URL=https://www.molex.com/pdm_docs/sd/022272031_sd.pdf, ComponentLink2Description="DigiKey Link", ComponentLink2URL=http://digikey.com/product-detail/en/molex/0022272031/WM4112-ND/1130578, Connector Type=Header, Contact Finish - Mating=Tin, Contact Finish - Post=Tin, Contact Finish Thickness - Mating="100.0µin (2.54µm)", Contact Length - Mating="0.295\" (7.49mm)", Contact Length - Post="0.140\" (3.56mm)", Contact Material=Brass, Contact Shape=Square, Contact Type="Male Pin", Fastening Type="Friction Lock", Insulation Height="0.461\" (11.70mm)", Insulation Material="Polyamide (PA), Nylon", LastUpdated="12/01/2020 23:51:54", Lifecycle Status=Active, Minimum Order=1, Mounting Type="Through Hole", Number of Positions=3, Number of Positions Loaded=All, Number of Rows=1, Overall Contact Length="0.560\" (14.22mm)", Packaging=Bulk, Part Number=0022272031, Part Status=Active, partid=77, Pitch - Mating="0.100\" (2.54mm)", Price=0.37, Series="KK 6410", Shrouding="Shrouded - 1 Wall", Style="Board to Cable/Wire", Supplier 1=DigiKey, Termination=Solder
L1: library part 74404032047, "FIXED IND 4.7UH 1.3A 96 MOHM SMD", Current - Saturation=1.2A, Current Rating (Amps)="1.3 A", DC Resistance (DCR)=96mOhm, Device Package=Nonstandard, Frequency - Self Resonant=50MHz, Inductance Frequency - Test="100 kHz", Manufacturer="Würth Elektronik", Operating Temperature="-40°C ~ 125°C", Ratings=AEC-Q200, Supplier Device Package=3015, Supplier Part Number 1=732-5495-1-ND, Tolerance=±20%, ComponentLink1Description=Datasheet, ComponentLink1URL=https://katalog.we-online.de/pbs/datasheet/74404032047.pdf, ComponentLink2Description="DigiKey Link", ComponentLink2URL=https://www.digikey.com/en/products/detail/würth-elektronik/74404032047/4865640, Height - Seated (Max)="0.059\" (1.50mm)", Inductance="4.7 µH", LastUpdated="16/03/2024 20:32:51", Lifecycle Status=Active, Material - Core=Ferrite, Minimum Order=1, Mounting Type="Surface Mount", Package / Case=Nonstandard, Packaging=TapeAndReel, Part Number=74404032047, Part Status=Active, partid=7005, Price=0.66, Series=WE-LQS, Shielding=Shielded, Size / Dimension="0.118\" L x 0.118\" W (3.00mm x 3.00mm)", Supplier 1=DigiKey, Type="Drum Core, Wirewound"
R1: library part CR0603-FX-1002ELF, "RES SMD 10K OHM 1% 1/10W 0603", Device Package="0603 (1608 Metric)", Manufacturer="Bourns Inc.", Operating Temperature="-55°C ~ 155°C", Power (Watts)="0.1W, 1/10W", Supplier Device Package=0603, Supplier Part Number 1=CR0603-FX-1002ELFCT-ND, Temperature Coefficient=±100ppm/°C, Tolerance=±1%, ComponentLink1Description=Datasheet, ComponentLink1URL=https://www.bourns.com/docs/Product-Datasheets/CHPREZTR.pdf, ComponentLink2Description="DigiKey Link", ComponentLink2URL=https://www.digikey.com/en/products/detail/bourns-inc/CR0603-FX-1002ELF/3593188, Composition="Thick Film", Features="Moisture Resistant", Height - Seated (Max)="0.022\" (0.55mm)", LastUpdated="20/01/2024 20:40:24", Lifecycle Status=Active, Minimum Order=1, Number of Terminations=2, Package / Case="0603 (1608 Metric)", Packaging=CutTape, Part Number=CR0603-FX-1002ELF, Part Status=Active, partid=17321, Price=0.01, Resistance="10 kOhms", Series=CR0603, Size / Dimension="0.063\" L x 0.031\" W (1.60mm x 0.80mm)", Supplier 1=DigiKey
TP1 TP2 TP3 TP4 TP5 TP6 TP7 TP8 TP9 TP10: library part CMP-003-000000-1, Component Type="Standard (No BOM)", Design Item ID="Test Point", Pin Count=1, Source="Test Point.SchLib"

## Via types
v1: diameter 0.6, hole 0.3, Top Layer to Bottom Layer, tented both sides, 461 vias
v2: diameter 0.9, hole 0.5, Top Layer to Bottom Layer, tented both sides, 10 vias

## Nets (pads, with @x,y where several pads share a name; then routed paths per layer and width w, separated by ;. In a path a pad name is that pad's centre, name@x,y a point inside that pad or via, vN(x,y) a via of type N, cw(c..) or ccw(c..) an arc to the next point about the centre after c; other vN are vias at no path point)
3V3: C17.2 C18.1 IC5.1 IC5.8 J2.1 R1.2 | length 13.2
  Top Layer w0.3: v1(25,37.5) 25.04,37.46 25.04,36.209 IC5.8@25.05,36.2 ; v1(30.4,44) R1.2 29.415,43.766 29.415,43.415 28.95,42.95 28.95,41.8 28.95,41.675 31,41.675 C17.2@32.5,41.675 ; IC5.8@34.05,36.2 34.06,36.209 34.06,37.46 v1(34.1,37.5) ; IC5.1@37.95,41.8 41.5,41.8 C17.2@41.5,41.675
  other v1: 31,42.3 32.5,42.3 40,42.3 41.5,42.3
5V: C1.2 C4.2 C5.1 C9.2 C10.2 C14.1 C15.2 C16.2 C19.2 C20.1 IC2.5 IC3.2 IC4.5 IC5.14 L1.1 TP4.1 | length 45.5
  Top Layer w0.3: C9.2 26.5,31.135 IC3.2 ; IC5.14@28.95,36.2 28.95,36.325 29.5,36.325 31,36.325 C19.2@32.5,36.325 ; IC5.14@37.95,36.2 41.5,36.2 C19.2@41.5,36.325
  Top Layer w0.8: C14.1 16.94,14.52 17.207,14.787 17.227,14.787 17.45,15.01 IC4.5 18.332,16.19 18.69,16.549 18.69,16.566 18.95,16.825 C15.2 C16.2 21.99,16.825 L1.1@22.3,16.516 ; L1.1 22.3,13.5 23.3,12.5 37,12.5 v2(38.5,14) C5.1 ; L1.1@22.3,16.258 L1.1@22.3,16.516 ; C1.2 22.825,17.375 22.3,16.85 L1.1@22.3,16.516 ; IC2.5 39.65,14.703 40.044,14.31 40.065,14.31 40.325,14.05 C5.1 ; C4.2 C5.1
  other v1: 39.7,12.5 39.7,14 17.5,14.5 21.6,15 21.6,16 19,16.1 20.5,16.1 21.6,17 22.2,18.5 26.5,31.9 28,31.9 31,35.7 32.5,35.7 40,35.7 41.5,35.7
5VDAC: C2.2 C3.1 IC1.14 L1.2 TP2.1 | length 8.7
  Top Layer w0.3: L1.2 24.7,16.85 25.01,17.16 26.334,17.16 C2.2 C3.1 ; v2(27.5,15.5) 27.5,15.803 28,16.303 C3.1 ; IC1.14 28.635,16.69 28.31,17.016 28.31,17.066 28.05,17.325 C3.1
6V5: C12.2 C13.2 IC4.1 J1.1 J4.1 | length 41
  Top Layer w0.3: IC4.1 17.562,18.923 C13.2@17.562,20.5
  Top Layer w0.8: J4.1 12.682,23.04 13.642,24 17,24 17.625,23.375 17.625,22.05 C12.2 C13.2
  Top Layer w1: J1.1 12,44.293 12,26.54 J4.1@9.191,23.731
BUFF_OUT: C8.1 IC2.1 IC2.4 J3.S TP1.1 | length 15.7
  Top Layer w0.3: IC2.4 39.875,17.45 41.69,15.635 42.265,15.635 IC2.1 42.375,15.525 46.475,15.525 C8.1 J3.S
  other v2: 44.5,15.5
CS_3V3: IC5.2@37.3,41.8 J2.5 | length 11.3
  Top Layer w0.3: IC5.2@37.3,41.8 37.3,45.959 37.523,46.183 40.533,46.183 42.048,47.698 J2.5
CS_5V: IC1.7 IC5.13@37.3,36.2 | length 12.9
  Top Layer w0.3: IC1.7 35,24.346 v1(35,25) ; v1(37.3,34.5) IC5.13@37.3,36.2
  Bottom Layer w0.3: v1(35,25) 35,31.2 37.3,33.5 v1(37.3,34.5)
DAC_OUT: IC1.2 IC2.3 TP8.1 | length 10.3
  Top Layer w0.3: IC1.2 36.96,17.96 38.5,19.5 v2(42.5,19.5) 42.5,17.534 42.415,17.45 IC2.3
DAC_REFF: C6.2 IC1.6 IC3.7 TP7.1 | length 13.1
  Top Layer w0.3: IC3.7 34.24,31.135 32.5,29.395 v2(32.5,26.5) 32.5,24.78 34.24,23.04 IC1.6 34.993,23.011 36.814,23.011 C6.2
DAC_REFS: C7.1 IC1.5 IC3.6 | length 17.1
  Top Layer w0.3: IC1.5 38.77,21.77 40.5,23.5 40.5,28 38.825,29.675 C7.1 36.839,29.836 34.994,29.836 IC3.6
GND: C1.1 C2.1 C3.2 C4.1 C5.2 C6.1 C7.2 C8.2 C9.1 C10.1 C11.2 C12.1 C13.1 C15.1 C16.1 C17.1 C18.2 C19.1 C20.2 IC1.3 IC1.4 IC1.12 IC2.2 IC3.3 IC3.4 IC4.2 IC5.7 J1.2 J2.6 J3.G J4.3 TP3.1 TP5.1 TP6.1 TP9.1 TP10.1 | length 159.6
  Top Layer w0.3: J4.3 14.54,17.96 15,17.5 16,17.5 16.381,17.881 16.381,18.452 IC4.2@16.619,18.691 ; J1.2 18.303,41.8 IC5.7@25.05,41.8 ; C12.1 16.412,21.913 16.412,18.898 IC4.2 IC4.2@16.619,18.691 ; v1(25,43) 25.04,42.96 25.04,41.809 IC5.7@25.05,41.8 ; C9.1 C10.1 IC3.3@30.035,29.825 ; v2(27.5,9) v1(29,7.5) v2(38.5,7.5) 40.069,7.5 43.034,10.466 ; 29.5,37.675 31,37.675 C18.2@31,40.325 ; IC3.3 IC3.3@30.035,29.825 ; C11.2 31.675,29.51 30.76,28.595 IC3.4 IC3.3@30.035,29.825 ; 32.5,38.3 v1(32.5,39.7) C17.1@32.5,40.325 ; v1(34,43) 34.04,42.96 34.04,41.809 IC5.7@34.05,41.8 ; C6.1 v1(37,24.8) 37,26.5 ; C7.2 37,26.5 ; v2(39,26.5) 37,26.5 ; C20.2@40,37.675 41.5,37.675 v1(41.5,38.3) v1(41.5,39.7) C17.1@41.5,40.325 ; C5.2 C4.1 41.675,12.45 43.034,11.091 43.034,10.466 ; IC2.2 43.5,16.5 44,17 44,22.5 42.5,24 ; v2(42.5,26) 42.5,24 ; C8.2 46.5,11 v2(44.5,9) 43.034,10.466 ; J2.6 47.525,42.525 45.325,40.325 C17.1@41.5,40.325 ; IC4.2@16.619,18.691 16.619,18.324 17.024,17.92 17.876,17.92 18.132,18.175 C15.1 C16.1 20.55,18.175 21.656,19.281 23.444,19.281 24.175,18.55 C1.1 24.262,18.588 27.912,18.588 C3.2 28.05,18.675 28.31,18.935 28.31,18.985 28.555,19.23 IC1.12 IC1.3 IC1.4 39,20.5 42.5,24 ; IC5.7@25.05,41.8 25.065,41.784 25.065,41.165 25.905,40.325 C18.2@31,40.325 ; C18.2@31,40.325 C17.1@32.5,40.325 ; C17.1@32.5,40.325 32.675,40.5 33.344,40.5 34.05,41.206 34.065,41.19 34.065,41.165 34.905,40.325 40,40.325 C17.1@41.5,40.325
  other v1: 2,1.5 4,1.5 6,1.5 8,1.5 10,1.5 12,1.5 14,1.5 16,1.5 18,1.5 20,1.5 22,1.5 24,1.5 26,1.5 28,1.5 30,1.5 32,1.5 34,1.5 36,1.5 38,1.5 40,1.5 42,1.5 44,1.5 46,1.5 48,1.5 50,1.5 52,1.5 3,3.5 5,3.5 7,3.5 9,3.5 11,3.5 13,3.5 15,3.5 17,3.5 19,3.5 21,3.5 23,3.5 25,3.5 27,3.5 29,3.5 31,3.5 33,3.5 35,3.5 37,3.5 39,3.5 41,3.5 43,3.5 45,3.5 47,3.5 49,3.5 51,3.5 53,3.5 2,5.5 4,5.5 6,5.5 8,5.5 10,5.5 12,5.5 14,5.5 16,5.5 18,5.5 20,5.5 22,5.5 24,5.5 26,5.5 28,5.5 30,5.5 32,5.5 34,5.5 36,5.5 38,5.5 40,5.5 42,5.5 44,5.5 46,5.5 48,5.5 50,5.5 52,5.5 3,7.5 5,7.5 11,7.5 13,7.5 15,7.5 17,7.5 19,7.5 21,7.5 23,7.5 25,7.5 27,7.5 31,7.5 33,7.5 35,7.5 37,7.5 41,7.5 43,7.5 45,7.5 47,7.5 49,7.5 51,7.5 53,7.5 2,9.5 4,9.5 6,9.5 8,9.5 10,9.5 12,9.5 14,9.5 16,9.5 18,9.5 20,9.5 22,9.5 24,9.5 26,9.5 30,9.5 32,9.5 34,9.5 36,9.5 38,9.5 40,9.5 42,9.5 46,9.5 48,9.5 50,9.5 52,9.5 3,11.5 5,11.5 7,11.5 9,11.5 11,11.5 13,11.5 15,11.5 43,11.5 45,11.5 47,11.5 42.3,12.5 39.2,13.1 2,13.5 4,13.5 6,13.5 8,13.5 10,13.5 12,13.5 14,13.5 44,13.5 46.5,13.5 48,13.5 17.5,13.7 42.3,14 3,15.5 5,15.5 7,15.5 9,15.5 11,15.5 13,15.5 19.7,15.8 43.1,16.5 2,17.5 4,17.5 6,17.5 12,17.5 14,17.5 44,17.5 46,17.5 48,17.5 24.8,18.5 19,18.9 20.5,18.9 36.2,19.2 26.5,19.4 28,19.4 3,19.5 5,19.5 22.2,19.5 43.7,19.5 45,19.5 47,19.5 16.5,19.7 15.6,20.5 26.8,20.5 36.2,20.5 42.5,20.7 28.5,21.1 2,21.5 4,21.5 6,21.5 12,21.5 14,21.5 42,21.5 44,21.5 46,21.5 48,21.5 50,21.5 52,21.5 15.6,22 3,23.5 5,23.5 19,23.5 43,23.5 45,23.5 47,23.5 49,23.5 51,23.5 53,23.5 30.7,25.1 34.3,25.1 2,25.5 4,25.5 6,25.5 8,25.5 14,25.5 16,25.5 18,25.5 44,25.5 46,25.5 48,25.5 50,25.5 52,25.5 3,27.5 5,27.5 7,27.5 9,27.5 15,27.5 17,27.5 19,27.5 43,27.5 45,27.5 47,27.5 49,27.5 51,27.5 53,27.5 37,27.7 26.5,29.1 27.9,29.1 2,29.5 4,29.5 6,29.5 8,29.5 10,29.5 14,29.5 16,29.5 18,29.5 42,29.5 44,29.5 46,29.5 48,29.5 50,29.5 52,29.5 3,31.5 5,31.5 7,31.5 9,31.5 15,31.5 17,31.5 19,31.5 45,31.5 47,31.5 49,31.5 51,31.5 53,31.5 27.2,32.2 2,33.5 4,33.5 6,33.5 8,33.5 10,33.5 14,33.5 16,33.5 18,33.5 46,33.5 48,33.5 50,33.5 52,33.5 36.5,33.7 32.4,34 34.9,34.5 38,34.5 40,35 41.5,35 31.7,35.2 3,35.5 5,35.5 7,35.5 9,35.5 15,35.5 17,35.5 19,35.5 47,35.5 49,35.5 51,35.5 53,35.5 2,37.5 4,37.5 10,37.5 14,37.5 16,37.5 18,37.5 24.3,37.5 34.8,37.5 50,37.5 52,37.5 31,38.3 31,38.3 40,38.3 3,39.5 5,39.5 7,39.5 9,39.5 15,39.5 17,39.5 19,39.5 47,39.5 49,39.5 51,39.5 53,39.5 31,39.7 40,39.7 2,41.5 4,41.5 6,41.5 8,41.5 10,41.5 14,41.5 16,41.5 18,41.5 46,41.5 48,41.5 50,41.5 52,41.5 31.8,42.7 40.8,42.7 3,43.5 5,43.5 7,43.5 9,43.5 15,43.5 17,43.5 19,43.5 47,43.5 49,43.5 51,43.5 53,43.5 2,45.5 4,45.5 6,45.5 8,45.5 14,45.5 16,45.5 18,45.5 46,45.5 48,45.5 50,45.5 52,45.5 3,47.5 5,47.5 15,47.5 17,47.5 19,47.5 51,47.5 53,47.5 2,49.5 4,49.5 6,49.5 8,49.5 10,49.5 12,49.5 14,49.5 16,49.5 18,49.5 46,49.5 48,49.5 50,49.5 52,49.5 3,51.5 5,51.5 7,51.5 9,51.5 11,51.5 13,51.5 15,51.5 17,51.5 19,51.5 21,51.5 23,51.5 25,51.5 27,51.5 29,51.5 31,51.5 33,51.5 35,51.5 37,51.5 39,51.5 41,51.5 43,51.5 45,51.5 47,51.5 49,51.5 51,51.5 53,51.5 2,53.5 4,53.5 6,53.5 8,53.5 10,53.5 12,53.5 14,53.5 16,53.5 18,53.5 20,53.5 22,53.5 24,53.5 26,53.5 28,53.5 30,53.5 32,53.5 34,53.5 36,53.5 38,53.5 40,53.5 42,53.5 44,53.5 46,53.5 48,53.5 50,53.5 52,53.5
LDAC_3V3: IC5.2@28.3,41.8 J2.2 R1.1 | length 8.2
  Top Layer w0.3: IC5.2@28.3,41.8 28.35,41.8 R1.1 28.35,44.85 30.923,47.423 32.01,47.423 J2.2
LDAC_5V: IC1.11 IC5.13@28.3,36.2 | length 19.4
  Top Layer w0.3: v1(27.5,20.5) IC1.11 ; v1(28.3,34.5) IC5.13@28.3,36.2
  Bottom Layer w0.3: v1(27.5,20.5) 27.5,27.9 29.3,29.7 29.3,33.5 v1(28.3,34.5)
MISO_3V3_LDAC_SHIFT: IC5.5@26.35,41.8
MISO_3V3_SPI_SHIFT: IC5.5@35.35,41.8
MISO_5V_LDAC_SHIFT: IC5.10@26.35,36.2
MISO_5V_SPI_SHIFT: IC5.10@35.35,36.2
MOSI_3V3: IC5.4@36,41.8 J2.3 | length 6
  Top Layer w0.3: IC5.4@36,41.8 36,47.698 J2.3
MOSI_3V3_LDAC_SHIFT: IC5.4@27,41.8
MOSI_5V: IC1.10 IC5.11@36,36.2 | length 19.1
  Top Layer w0.3: v1(28.5,21.8) 28.515,21.785 30.021,21.785 IC1.10 ; v1(35.7,34.5) 35.7,34.581 36,34.881 IC5.11@36,36.2
  Bottom Layer w0.3: v1(28.5,21.8) 28.5,27.3 v1(35.7,34.5)
MOSI_5V_LDAC_SHIFT: IC5.11@27,36.2
NetC14_2: C14.2 IC4.4 | length 1.9
  Top Layer w0.3: IC4.4 15.55,15.01 15.93,14.63 15.95,14.63 16.06,14.52 C14.2
SCLK_3V3: IC5.3@36.65,41.8 J2.4 | length 8.2
  Top Layer w0.3: IC5.3@36.65,41.8 36.65,46.11 38.238,47.698 J2.4
SCLK_3V3_LDAC_SHIFT: IC5.3@27.65,41.8
SCLK_5V: IC1.8 IC5.12@36.65,36.2 | length 14.7
  Top Layer w0.3: v1(30,25) 30,24.346 IC1.8 ; v1(36.5,34.5) 36.5,34.581 36.65,34.731 IC5.12@36.65,36.2
  Bottom Layer w0.3: v1(30,25) 30,28 v1(36.5,34.5)
SCLK_5V_LDAC_SHIFT: IC5.12@27.65,36.2
VREF_NR: C11.1 IC3.1 | length 1.9
  Top Layer w0.3: IC3.1 30.325,32.405 C11.1
VREG_SHDN: IC4.3 J4.2 | length 7.8
  Top Layer w0.3: J4.2 10.5,20.5 12.19,18.81 IC4.3
pads on no net: FID1.F FID2.F FID3.F IC1.1 IC1.9 IC1.13 IC3.5 IC3.8 IC5.6 IC5.9

## Polygon pours and split planes (outlines as drawn)
GND on Bottom Layer "GND_L04_P007" (solid, remove dead copper, pour order 7): 0,0 0,55 55,55 55,0
5V on Bottom Layer "5V_L04_P001" (solid, remove dead copper, pour order 1): 16,11 41,11 41,30 45,34 45,36.2 20,36.2 20,21 16,17
3V3 on Bottom Layer "3V3_L04_P000" (solid, remove dead copper, pour order 0): 20,50 45,50 45,36.8 20,36.8
GND on Top Layer "GND_L01_P006" (solid, remove dead copper, pour order 6): 0,0 0,55 55,55 55,0
5V on Top Layer "5V_L01_P003" (solid, remove dead copper, pour order 3): 41,11 41,15 40,16 37.5,16 35,13.5 23.5,13.5 23,14 23,17 23.5,17.5 23.5,19 22,19 21.5,18.5 21.5,17.5 17.5,17.5 16.5,16.5 16.5,11
5VDAC on Top Layer "5VDAC_L01_P002" (solid, remove dead copper, pour order 2): 24,17.5 24,14 32.5,14 32.5,17.5 29,17.5 29,18 25.5,18 25.5,17.5
GND on 2 GND "GND_L02_P004" (solid, remove dead copper, pour order 4): 0,55 55,55 55,0 0,0
GND on 3 GND "GND_L03_P005" (solid, remove dead copper, pour order 5): 0,0 0,55 55,55 55,0

## Silkscreen, mask and mechanical layers (free items; w line width, h text height)
Top Overlay:
  circle w0.2: c42.5,26 r1.221
  circle w0.2: c39,26.5 r1.221
  circle w0.2: c44.5,9 r1.221
  circle w0.2: c38.5,7.5 r1.221
  circle w0.2: c27.5,9 r1.221
  lines w0.2: 5.706,16.69 5.706,14.3 11.294,14.3 11.294,16.69 ; 5.706,24.31 5.706,26.8 11.294,26.8 11.294,24.31 ; 6.182,46.301 3.7,46.301 3.7,51.5 6.2,51.5 ; 14.8,51.5 17.3,51.5 17.3,46.301 14.818,46.301
  text "6.5V" at 3.684,51.5 h2 r270
  text "GND" at 14.8,51.5 h2 r270
  text "V1R0" at 24.4,44.5 h2 r90
  text "6.5V" at 5.706,24.31 h2
  text "Original Circuit Limited" at 51.466,24.159 h2 r90
  text "MAXIM MAX5719GSD+" at 20.818,24 h3 r90
  text "Breakout Board" at 24.4,24 h3 r90
  text "GND" at 5.706,14.215 h2
Bottom Overlay:
  text "CS" at 42.945,43.449 h2.5 r270
  text "3V3" at 27.702,42.152 h2.5 r270
  text "6V5" at 7.82,42.121 h2.5 r270
  text "GND" at 11.635,41.601 h2.5 r270
  text "GND" at 46.755,41.601 h2.5 r270
  text "MOSI" at 35.325,41.065 h2.5 r270
  text "SCLK" at 39.135,40.818 h2.5 r270
  text "LDAC" at 31.515,40.665 h2.5 r270
Top Solder:
  lines w2: 1,3.5 ccw(c3.5,3.5) 3.5,1 51.5,1 ccw(c51.5,3.5) 54,3.5 54,51.5 ccw(c51.5,51.5) 51.5,54 3.5,54 ccw(c3.5,51.5) 1,51.5 1,7.5 1,3.5
Bottom Solder:
  lines w2: 1,3.5 ccw(c3.5,3.5) 3.5,1 51.5,1 ccw(c51.5,3.5) 54,3.5 54,51.5 ccw(c51.5,51.5) 51.5,54 3.5,54 ccw(c3.5,51.5) 1,51.5 1,7.5 1,3.5